# Altium PCB UAVCAN LIDAR.PcbDoc (part 1 of 2)
Units mm, origin at the board's own origin, x right, y up, seen from the top; angles counter-clockwise.
Board outline 36.2 x 66.55 mm, 2 copper layers (Top Layer, Bottom Layer); 103 components, 64 nets, 316 pads, 230 vias.
Unrouted connection lines stored in the file: 2.
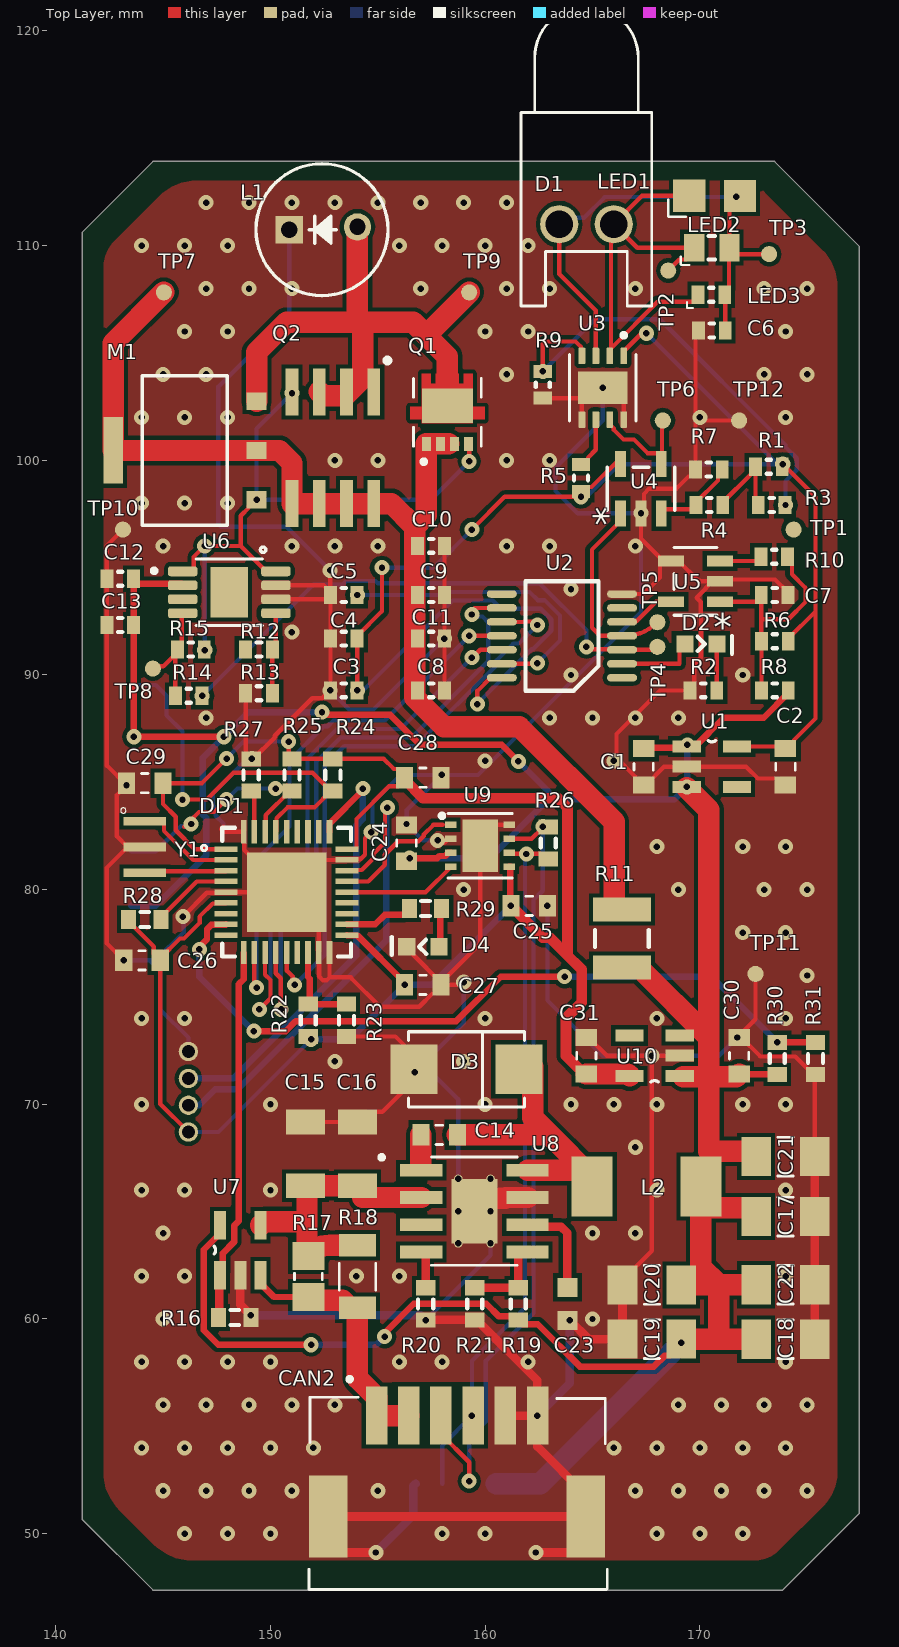
[diagram p0: Top Layer view]
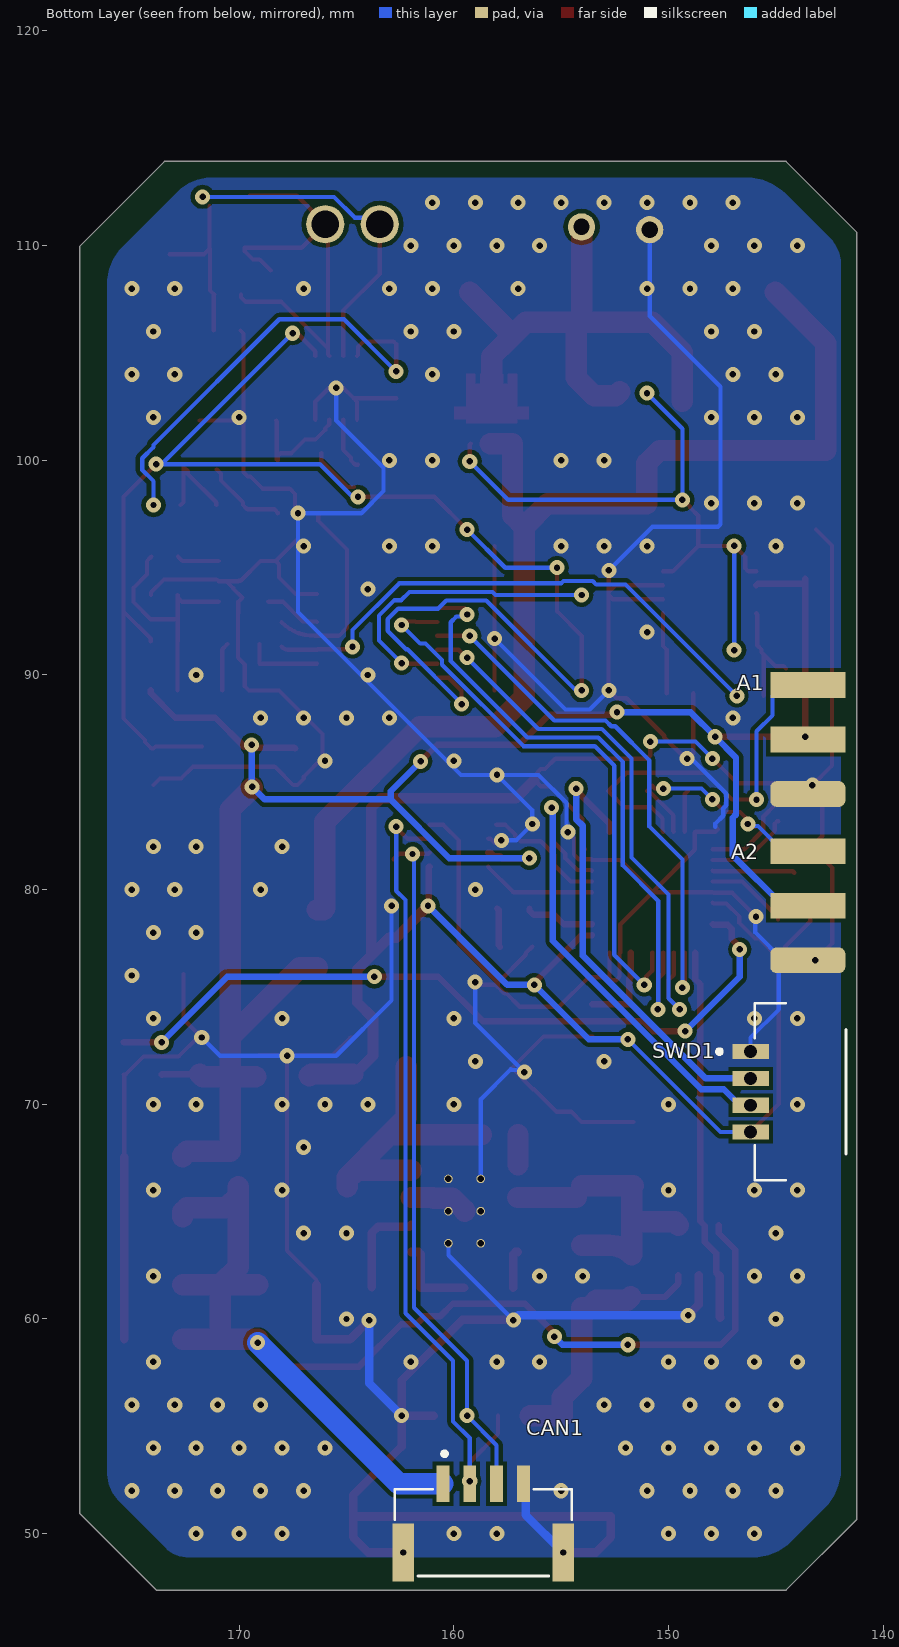
[diagram p1: Bottom Layer view, seen from below]
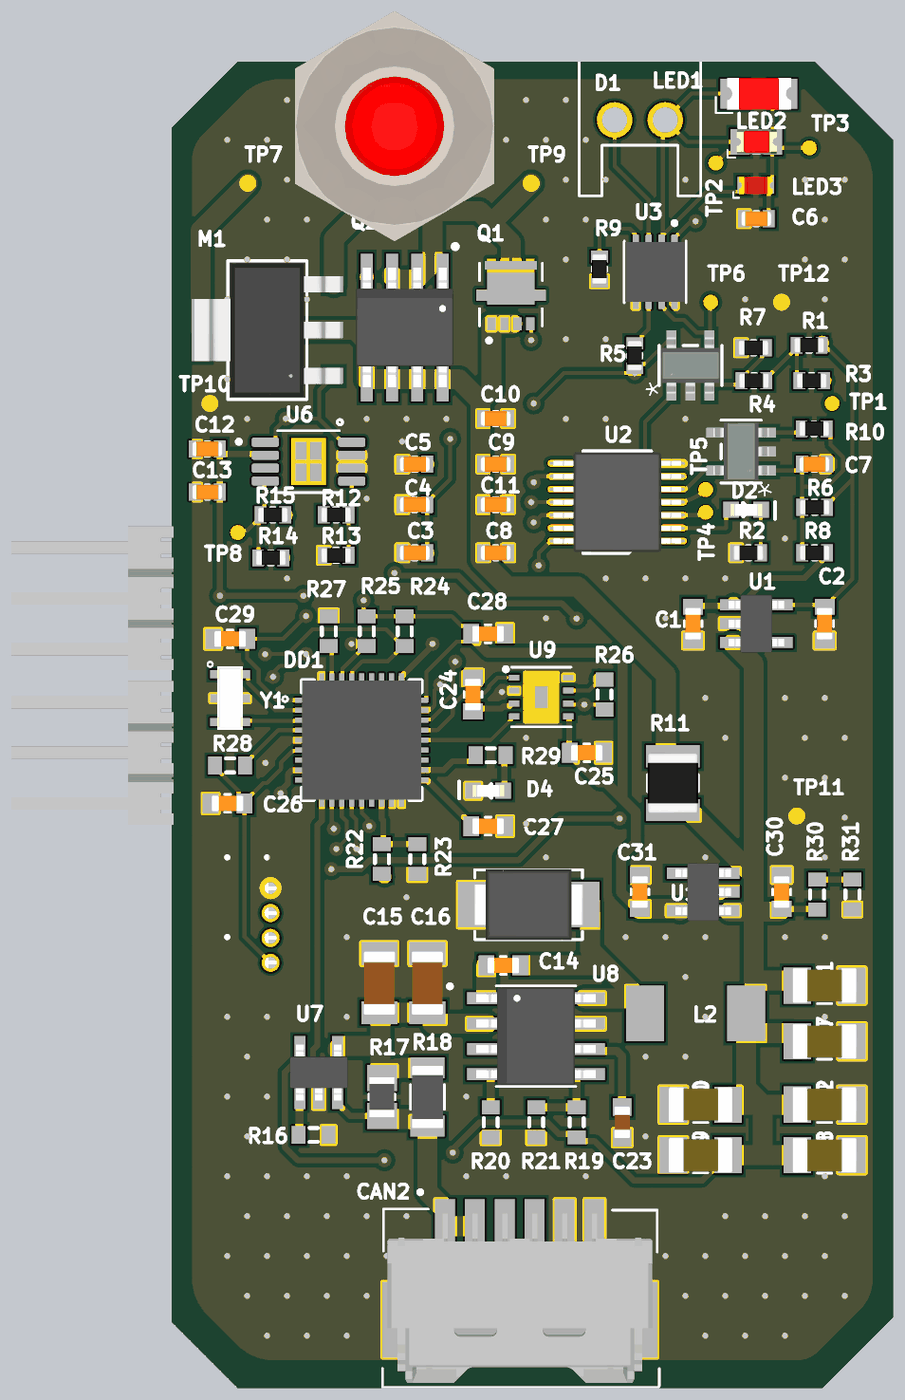
[diagram p2: 3D render of the assembled board from above, using the file's embedded part models]
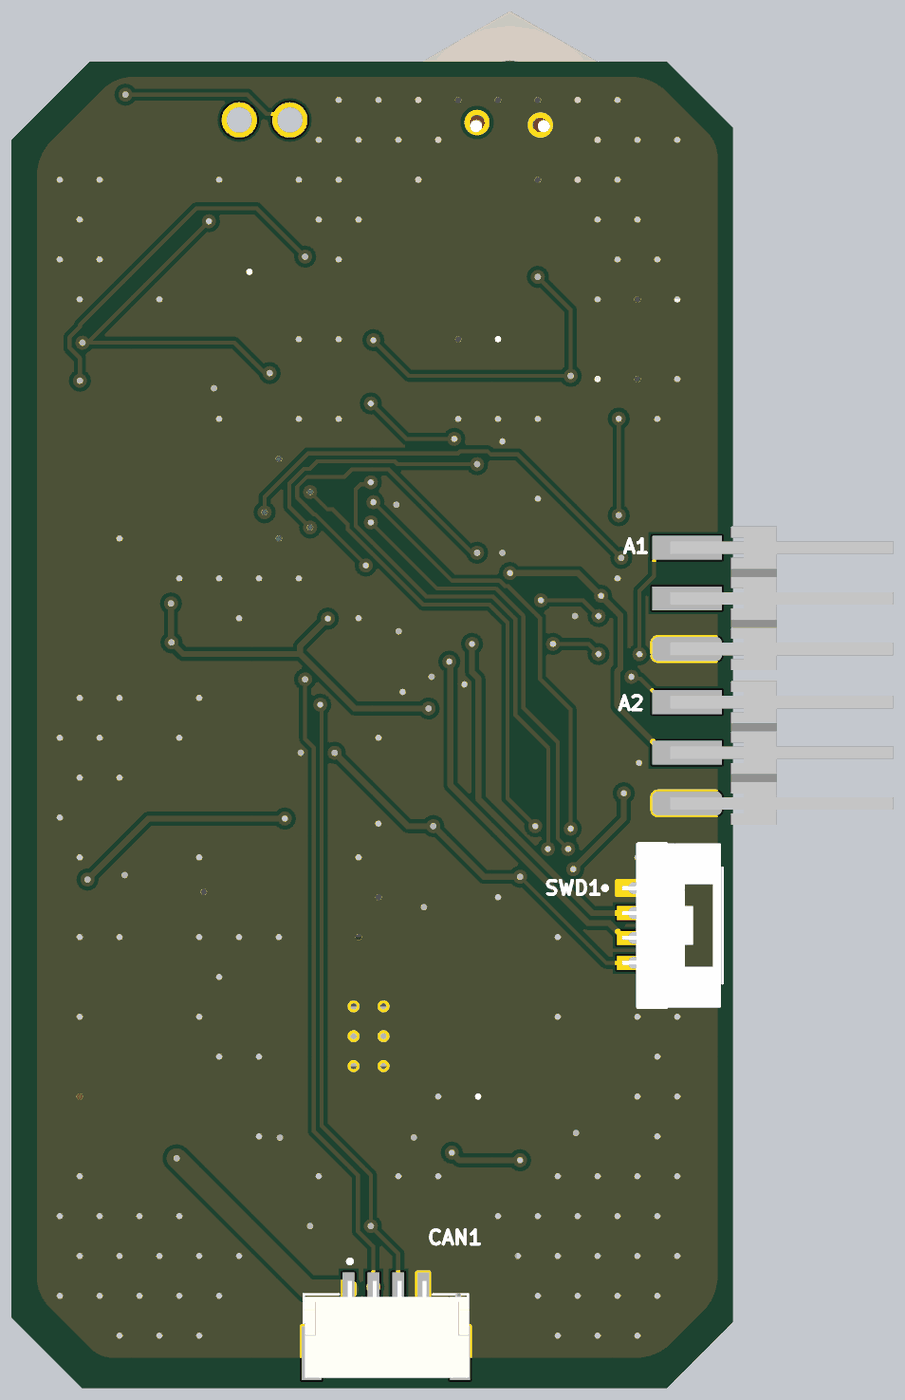
[diagram p3: 3D render of the assembled board from below, using the file's embedded part models]

## Layer stack, top to bottom
Top Solder: solder mask 0.0102, Solder Resist, Dk 3.5
Top Layer: signal copper 0.0356
Dielectric 1: dielectric 0.32, FR-4, Dk 4.8
Bottom Layer: signal copper 0.0356
Bottom Solder: solder mask 0.0102, Solder Resist, Dk 3.5

## Board outline
141.224,50.673 141.224,110.617 144.526,113.919 173.482,113.919 177.419,109.982 177.419,50.927 173.863,47.371 144.526,47.371

## Design rules (kind name [scope] priority, off if disabled: settings)
Clearance [All] p1: gap=0.2 ignorepadtopadclearanceinfootprint=FALSE
HoleSize [All] p1: absolutevalues=TRUE maxlimit=2.54 minlimit=0.3 maxpercent=80.000 minpercent=20.000
PolygonConnect [All] p1: connectstyle=Direct reliefconductorwidth=0.254 reliefentries=4 polygonreliefangle="90 Angle" airgapwidth=0.254
RoutingVias [All] p1: holewidth=0.3 width=0.7 viastyle="Through Hole" minholewidth=0.3 minwidth=0.7 maxholewidth=2 maxwidth=10
SolderMaskExpansion [All] p1: expansion=0.102 istentingtop=FALSE
Width [All] p1: maxlimit=2 minlimit=0.17 preferedwidth=0.254
29 further rules are at their usual default settings.

## Classes and differential pairs
component class CONNECTORS: A1 A2 CAN1 CAN2
component class STM32F103T8: C24 C25 C26 C27 C28 C29 C30 C31 D4 DD1 R22 R23 R24 R25 R26 R27 R28 R29 R30 R31 SWD1 U9 U10 Y1
component class DCDC-LMR16030: C14 C15 C16 C17 C18 C19 C20 C21 C22 C23 D3 L2 R16 R17 R18 R19 R20 R21 U7 U8
component class "UAVCAN LIDAR": C1 C2 C3 C4 C5 C6 C7 C8 C9 C10 C11 C12 C13 D1 D2 L1 LED1 LED2 LED3 M1 Q1 Q2 R1 R2 R3 R4 R5 R6 R7 R8 R9 R10 R11 R12 R13 R14 R15 TP1 TP2 TP3 TP4 TP5 TP6 TP7 TP8 TP9 TP10 TP11 TP12 U1 U2 U3 U4 U5 U6

## Components (designator, comment, footprint, x,y, rotation, side; value= is the part's Value field where it differs from the comment)
A1 "A" "HDR Side 3 pin" 143.51,86.995 r90 bottom
A2 "A" "HDR Side 3 pin" 143.51,79.248 r90 bottom
C1 "GX035C104MAT2-500" *CAPC1608X90 167.386,85.725 r270 top value=0.1u
C2 "GX035C104MAT2-500" *CAPC1608X90 173.99,85.725 r270 top value=0.1u
C3 "" SMD_CAP_0603 153.416,89.281 r180 top value=100nF
C4 "" SMD_CAP_0603 153.416,91.694 r180 top value=2.2uF
C5 "" SMD_CAP_0603 153.416,93.726 r0 top value=1uF
C6 "" SMD_CAP_0603 170.561,106.045 r180 top value=1n
C7 "" SMD_CAP_0603 173.482,93.726 r0 top value=2.2uF
C8 "" SMD_CAP_0603 157.48,89.281 r0 top value=22nF
C9 "" SMD_CAP_0603 157.48,93.726 r0 top value=22nF
C10 "" SMD_CAP_0603 157.48,96.012 r0 top value=22nF
C11 "" SMD_CAP_0603 157.48,91.694 r0 top value=22nF
C12 "" SMD_CAP_0603 143.002,94.488 r180 top value=100nF
C13 "" SMD_CAP_0603 143.002,92.329 r180 top value=10uF
C14 "GX035C104MAT2-500" *CAPC1608X90 157.861,68.58 r180 top value=0.1u
C15 "GRM31CR71H225KA88L" *CAP3216X125N 151.638,67.691 r90 top value=2.2u
C16 "GRM31CR71H225KA88L" *CAP3216X125N 154.051,67.691 r90 top value=2.2u
C17 "GRM31CR61A476KE15L" *CAPC3216X125N 173.99,64.77 r180 top value=47u
C18 "GRM31CR61A476KE15L" *CAPC3216X125N 173.99,61.595 r180 top value=47u
C19 "GRM31CR61A476KE15L" *CAPC3216X125N 167.765,59.059 r0 top value=47u
C20 "GRM31CR61A476KE15L" *CAPC3216X125N 167.765,61.59 r0 top value=47u
C21 "GRM31CR61A476KE15L" *CAPC3216X125N 173.99,67.564 r180 top value=47u
C22 "GRM31CR61A476KE15L" *CAPC3216X125N 173.99,59.055 r180 top value=47u
C23 "GRM188R71C105KA12D" CAPC1608X90N 163.83,60.706 r90 top value=1u
C24 "GX035C104MAT2-500" *CAPC1608X90 156.337,82.169 r90 top value=0.1u
C25 "GX035C104MAT2-500" *CAPC1608X90 162.052,79.248 r0 top value=0.1u
C26 "GX035C104MAT2-500" *CAPC1608X90 144.018,76.708 r180 top value=0.1u
C27 "GX035C104MAT2-500" *CAPC1608X90 157.099,75.565 r0 top value=0.1u
C28 "GX035C104MAT2-500" *CAPC1608X90 157.099,85.217 r0 top value=0.1u
C29 "GX035C104MAT2-500" *CAPC1608X90 144.145,84.963 r180 top value=0.1u
C30 "GX035C104MAT2-500" *CAPC1608X90 171.831,72.263 r90 top value=0.1u
C31 "GX035C104MAT2-500" *CAPC1608X90 164.719,72.263 r90 top value=0.1u
CAN1 "SM04B-GHS-TB(LF)(SN)-" JST_SM04B-GHS-TB(LF)(SN)- 158.633,50.049 r180 bottom
CAN2 "502585-0670" MOLEX_502585-0670 158.69,55.299 r0 top
D1 "LED0" LED-0 164.719,110.998 r180 top
D2 "KP-608SECK" *LEDM1608X80_LTE-C1906R-14(Primary) 170.053,91.44 r180 top
D3 "SK56" *SMB_P6SMB62AT3G(Primary) 159.131,71.628 r0 top
D4 "0603-LED-BLUE" *LEDM1608X80_LTE-C1906R-14(Primary) 157.099,77.343 r0 top
DD1 "STM32F103T8" *QFN50P600X600X100-37N 150.749,79.883 r0 top
L1 "LASER" SPL-PL90 151.13,110.744 r0 top
L2 "IHLP2020BZER100M01" IHLP 167.513,66.167 r180 top
LED1 "LED" LED1206 170.053,112.395 r180 top
LED2 "LED" LED0805 170.561,109.855 r180 top
LED3 "LED" LED0603 170.561,107.696 r180 top
M1 "BSP318SL6327" PG-SOT223-4_INF-L 146.012,100.457 r90 top
Q1 "NTTFS5826NL" *TRANS_NVTFS015N04CTAG 158.242,102.235 r90 top
Q2 "IRF7862" *SO-08 152.908,100.584 r180 top
R1 "0R" "RES 0603 (1608X06L)" 173.837,99.695 r180 top
R2 "1K" "RES 0603 (1608X06L)" 169.545,89.281 r0 top
R3 "0R" "RES 0603 (1608X06L)" 173.964,97.917 r180 top
R4 "?" "RES 0603 (1608X06L)" 171.069,97.917 r180 top
R5 "51R" "RES 0603 (1608X06L)" 164.465,98.552 r90 top
R6 "0R" "RES 0603 (1608X06L)" 174.117,91.567 r180 top
R7 "?" "RES 0603 (1608X06L)" 171.043,99.568 r180 top
R8 "0R" "RES 0603 (1608X06L)" 174.117,89.281 r180 top
R9 "100K" "RES 0603 (1608X06L)" 162.687,102.896 r90 top
R10 "6.25K" "RES 0603 (1608X06L)" 174.091,95.504 r180 top
R11 "100R" "RES 1210 (3226X07L)" 166.37,77.724 r270 top
R12 "100R" "RES 0603 (1608X06L)" 148.844,91.186 r0 top
R13 "100R" "RES 0603 (1608X06L)" 150.088,89.154 r180 top
R14 "0R" "RES 0603 (1608X06L)" 145.568,89.027 r0 top
R15 "0R" "RES 0603 (1608X06L)" 145.669,91.186 r0 top
R16 "Res3" J1-0603 148.336,60.071 r180 top value=1k
R17 "RC0805FR-131RL" RESC2012X60 151.765,61.976 r90 top
R18 "CRGH1206J1R0" RESC3115X65N 154.051,61.976 r90 top
R19 "Res3" J1-0603 161.544,60.706 r270 top value=56k
R20 "Res3" J1-0603 157.226,60.706 r90 top value=56k
R21 "RC0603FR-0710KL" J1-0603 159.512,60.706 r90 top value=10k
R22 "RC0603FR-0710KL" J1-0603 151.765,73.914 r270 top value=10k
R23 "RC0603FR-0710KL" J1-0603 153.543,73.914 r90 top value=10k
R24 "Res3" J1-0603 152.908,85.344 r90 top value=4.7k
R25 "Res3" J1-0603 151.003,85.344 r90 top value=4.7k
R26 "Res3" J1-0603 162.941,82.169 r90 top value=120
R27 "RC0603FR-0710KL" J1-0603 149.098,85.344 r270 top value=10k
R28 "RC0603FR-0710KL" J1-0603 144.145,78.613 r0 top value=10k
R29 "Res3" J1-0603 157.226,79.121 r0 top value=330
R30 "RC0603FR-0710KL" J1-0603 173.609,72.136 r270 top value=10k
R31 "RC0603FR-0710KL" J1-0603 175.387,72.136 r90 top value=10k
SWD1 "BM04B-GHS-TBT(LF)(SN)(N)" JST_BM04B-GHS-holes 142.827,70.582 r90 bottom
TP1 "Test Point" PAD1 174.371,96.774 r0 top
TP2 "Test Point" PAD1 168.529,108.839 r0 top
TP3 "Test Point" PAD1 173.228,109.601 r0 top
TP4 "Test Point" PAD1 168.021,91.313 r0 top
TP5 "Test Point" PAD1 168.021,92.456 r0 top
TP6 "Test Point" PAD1 168.275,101.854 r0 top
TP7 "Test Point" PAD1 145.034,107.823 r0 top
TP8 "Test Point" PAD1 144.526,90.297 r0 top
TP9 "Test Point" PAD1 159.258,107.823 r0 top
TP10 "Test Point" PAD1 143.129,96.774 r90 top
TP11 "Test Point" PAD1 172.593,76.073 r90 top
TP12 "Test Point" PAD1 171.831,101.854 r90 top
U1 "SPX3819M5-L-3-3/TR" *SOT95P280X145-5N 170.561,85.725 r0 top value=3V3
U2 "TDC7200PWR" PW0014A_L 163.576,91.821 r180 top
U3 "MAX3658AETAT" SON65P300X300X80-9N 165.481,103.378 r270 top
U4 "LMV7219M7X/NOPB" SOT-5_S_LIT 167.259,98.679 r90 top
U5 "LTC1799CS5#TRMPBF" SOT-5_S_LIT 169.799,94.361 r180 top
U6 "MIC44F18YMME-TR" SOP65P490X104-9N 148.082,93.853 r0 top
U7 "INA169NA/3K" *SOT95P280X145-5N 148.597,63.206 r90 top
U8 "LMR16030SDDAR" "*SOIC127P600X170-9N - duplicate" 159.5,65.024 r0 top
U9 "TJA1042" SOT782-1 159.766,82.042 r270 top
U10 "SPX3819M5-L-3-3/TR" *SOT95P280X145-5N 167.894,72.263 r180 top value=3V3
Y1 "CSTCE8M00G55-R0" *OSC_CSTCE8M00G55-R0 144.145,81.985 r270 top

## Footprints (in the part's own frame and the unit in brackets; to place one, negate y for a bottom-side part, rotate by r counter-clockwise, add the part's x,y. Pads: shape width x height; smd on the part's side, far side on the other; paste and mask are expansions set on the pad)
*CAP3216X125N [mm]
  rect 1.15x1.82 smd: 1(-1.485,0) 2(1.485,0)
  body extent -1.6,-0.8 1.6,0.8, height 1.22
*CAPC1608X90 [mm]
  rect 0.8x1 smd: 1(-0.85,0) 2(0.85,0)
  silkscreen extent -0.15,-0.45 0.15,0.45, body extent -0.8,-0.4 0.8,0.41, height 0.88
*CAPC3216X125N [mm]
  rect 1.38x1.82 smd: 1(-1.369,0) 2(1.369,0)
  silkscreen extent -0.36,-0.9 0.36,0.9, body extent -1.6,-0.87 1.6,0.87, height 1.71
*LEDM1608X80_LTE-C1906R-14(Primary) [mm]
  rect 0.8x0.8 smd: A(0.75,0) C(-0.75,0)
  silkscreen extent -1.45,-0.38 0.16,0.45, body extent -0.8,-0.3 0.8,0.3, height 1.15
*OSC_CSTCE8M00G55-R0 [mm]
  rect 0.4x2 smd: 1(-1.2,0) 2(0,0) 3(1.2,0)
  silkscreen extent -1.83,-1.13 -1.57,-0.87, body extent -1.6,-0.65 1.6,0.65, height 1
*QFN50P600X600X100-37N [mm]
  rect 1.08x0.26 smd: 1(-2.815,2) 2(-2.815,1.5) 3(-2.815,1) 4(-2.815,0.5) 5(-2.815,0) 6(-2.815,-0.5) 7(-2.815,-1) 8(-2.815,-1.5) 9(-2.815,-2) 19(2.815,-2) 20(2.815,-1.5) 21(2.815,-1) 22(2.815,-0.5) 23(2.815,0) 24(2.815,0.5) 25(2.815,1) 26(2.815,1.5) 27(2.815,2)
  rect 0.26x1.08 smd: 10(-2,-2.815) 11(-1.5,-2.815) 12(-1,-2.815) 13(-0.5,-2.815) 14(0,-2.815) 15(0.5,-2.815) 16(1,-2.815) 17(1.5,-2.815) 18(2,-2.815) 28(2,2.815) 29(1.5,2.815) 30(1,2.815) 31(0.5,2.815) 32(0,2.815) 33(-0.5,2.815) 34(-1,2.815) 35(-1.5,2.815) 36(-2,2.815)
  rect 3.7x3.7 smd: 37(0,0)
  silkscreen extent -3.97,-3 3,3, body extent -3,-3 3,3, height 1
*SMB_P6SMB62AT3G(Primary) [mm]
  rect 2.2x2.3 smd: A(-2.45,0) C(2.45,0)
  silkscreen extent -2.7,-1.75 2.7,1.75, body extent -2.72,-1.78 2.72,1.78, height 2.49
*SO-08 [mm]
  rect 0.6x2.2 smd: D(-1.905,2.6) D(-0.635,2.6) D(0.635,2.6) D(1.905,2.6) G(1.905,-2.6) S(-1.905,-2.6) S(-0.635,-2.6) S(0.635,-2.6)
  silkscreen extent -2.64,-4.16 -2.44,-3.96, body extent -2.45,-3 2.45,3, height 1.73
"*SOIC127P600X170-9N - duplicate" [mm]
  rect 1.97x0.6 smd: 1(-2.475,1.905) 2(-2.475,0.635) 3(-2.475,-0.635) 4(-2.475,-1.905) 5(2.475,-1.905) 6(2.475,-0.635) 7(2.475,0.635) 8(2.475,1.905)
  round 0.4 hole 0.3: 9(-0.75,-1.5) 9(-0.75,0) 9(-0.75,1.5) 9(0.75,-1.5) 9(0.75,0) 9(0.75,1.5)
  rect 2.13x3 smd: 9(0,0)
  silkscreen extent -4.42,-2.52 2,2.6, body extent -3,-2.45 3,2.45, height 1.69
*SOT95P280X145-5N [mil]
  rect 52x22 smd: 1(-46,37) 2(-46,0) 3(-46,-37) 4(46,-37) 5(46,37)
  silkscreen extent -7,46 7,48, body extent -55,-57 55,57, height 57
*TRANS_NVTFS015N04CTAG [mm]
  rect 1.6x2.37 smd: D(0.3,0)
  rect 0.66x0.42 smd: G(-1.47,-0.975) S(-1.47,-0.325) S(-1.47,0.325) S(-1.47,0.975)
  Top Layer region: -0.5,-1.185 -0.5,1.185 -0.32,1.185 -0.32,1.73 0.25,1.73 0.25,1.185 1.8,1.185 1.8,0.765 1.33,0.765 1.33,0.535 1.8,0.535 1.8,0.115 1.33,0.115 1.33,-0.115 1.8,-0.115 1.8,-0.535 1.33,-0.535 1.33,-0.765 1.8,-0.765 1.8,-1.185 0.25,-1.185 0.25,-1.73 -0.32,-1.73 -0.32,-1.185
  silkscreen extent -2.4,-1.58 1.58,1.58
CAPC1608X90N [mm]
  rect 0.89x0.93 smd: 1(-0.77,0) 2(0.77,0)
  body extent -0.8,-0.4 0.8,0.4, height 0.9
"HDR Side 3 pin" [mm]
  rrect50% 1.2x3.5 smd: 1(-2.54,0)
  rect 1.2x3.5 smd: 2(0,0) 3(2.54,0)
  body extent -3.61,-10.34 3.61,0.83, height 1.67
IHLP [mil]
  rect 75x110 smd: 1(-100,0) 2(100,0)
  body extent -100,-100 100,100, height 79
J1-0603 [mm] "Chip Resistor, Body 1.6x0.8mm, IPC High Density"
  rect 0.7x0.9 smd: 1(-0.75,0) 2(0.75,0)
  silkscreen extent -0.2,-0.35 0.2,0.35, body extent -0.85,-0.48 0.85,0.48, height 0.9
JST_BM04B-GHS-holes [mm]
  rect 0.7x1.7 / inner rect 0.6x1.7 / far side round 0.9 hole 0.6: 1(1.875,3.35) 2(0.625,3.35) 3(-0.625,3.35) 4(-1.875,3.35)
  silkscreen extent -4.13,-1.1 4.13,4.9, body extent -4.12,-1.02 4.12,3.93, height 4.15
JST_SM04B-GHS-TB(LF)(SN)- [mm]
  rect 0.6x1.7 smd: 1(-1.875,2.275) 2(-0.625,2.275) 3(0.625,2.275) 4(1.875,2.275)
  rect 1x2.7 smd: SH1(-3.725,-0.925) SH2(3.725,-0.925)
  silkscreen extent -4.13,-2.02 4.13,3.77, body extent -4.06,-2.16 4.19,2.69, height 4.35
LED0603 [mm]
  rect 0.6x0.85 smd: 1(-0.6,-0.021) 2(0.644,-0.021)
  silkscreen extent -0.08,-0.35 1.15,0.6, body extent -0.82,-0.48 0.88,0.42, height 0.9
LED0805 [mm]
  rect 0.95x1.3 smd: 1(-0.822,-0.047) 2(0.828,-0.047)
  silkscreen extent -0.15,-0.6 1.45,0.75, body extent -1.03,-0.67 0.99,0.58, height 1.1
LED1206 [mm]
  rect 1.5x1.5 smd: 1(-1.814,0.08) 2(0.55,0.075)
  silkscreen extent 0.7,0.25 1.53,1.05, body extent -2.25,-0.73 0.95,0.87, height 1.1
LED-0 [mil] "LED; 2 Leads"
  round 70 hole 50: 1(50,0) 2(-50,0)
  silkscreen extent -120,-400 120,150
MOLEX_502585-0670 [mm]
  rect 1x2.7 smd: 1(-3.75,0.2) 2(-2.25,0.2) 3(-0.75,0.2) 4(0.75,0.2) 5(2.25,0.2) 6(3.75,0.2)
  rect 1.8x3.8 smd: P1(-6,-4.5) P2(6,-4.5)
  silkscreen extent -6.9,-7.9 7,2, body extent -6.65,-7.68 6.65,0.82, height 6.41
PAD1 [mm]
  round 0.75 smd paste-1 mask+0.051: 1(0,0)
PG-SOT223-4_INF-L [mil]
  rect 32x36 smd paste+0 mask+0: 1(-90.55,-131.5) 2(0,-131.5) 3(90.55,-131.5)
  rect 122x36 smd paste+0 mask+0: 4(0,131.5)
  silkscreen extent -187,-148 137,78, body extent -132,-143 132,144, height 67
PW0014A_L [mm]
  oval 1.4x0.35 smd paste-0.102 mask+0.051: 1(-2.8,1.95) 2(-2.8,1.3) 3(-2.8,0.65) 4(-2.8,0) 5(-2.8,-0.65) 6(-2.8,-1.3) 7(-2.8,-1.95) 8(2.8,-1.95) 9(2.8,-1.3) 10(2.8,-0.65) 11(2.8,0) 12(2.8,0.65) 13(2.8,1.3) 14(2.8,1.95)
  silkscreen extent -1.7,-2.55 1.7,2.55, body extent -3.2,-2.5 3.2,2.5, height 1.13
"RES 0603 (1608X06L)" [mm] "Chip Resistor, 2-Leads, Body 1.6x0.8mm, IPC High Density _ (0.063W)"
  rect 0.6x0.85 smd: 1(0,0) 2(1.244,0)
  silkscreen extent 0.52,-0.33 0.72,0.33, body extent -0.14,-0.38 1.38,0.38, height 0.45
"RES 1210 (3226X07L)" [mm] "Chip Resistor, 2-Leads, Body 3.2x2.6mm, IPC High Density _ (0.250 W)"
  rect 1.1x2.7 smd: 1(-1.35,0) 2(1.35,0)
  silkscreen extent -0.4,-1.25 0.4,1.25, body extent -1.52,-1.27 1.52,1.27, height 0.6
RESC2012X60 [mm]
  rect 1.3x1.5 smd: 1(-0.95,0) 2(0.95,0)
  silkscreen extent -0.15,-0.65 0.15,0.65, body extent -1,-0.63 1,0.63, height 0.3
RESC3115X65N [mm]
  rect 1.05x1.72 smd: 1(-1.46,0) 2(1.46,0)
  silkscreen extent -0.62,-0.85 0.62,0.85, body extent -1.55,-0.77 1.55,0.77, height 0.65
SMD_CAP_0603 [mm]
  rect 0.6x0.85 smd: 1(-0.622,0) 2(0.622,0)
  silkscreen extent -0.1,-0.33 0.1,0.33, body extent -0.76,-0.38 0.76,0.38, height 0.6
SON65P300X300X80-9N [mm]
  rrect25% 0.76x0.32 smd: 1(-1.485,0.975) 2(-1.485,0.325) 3(-1.485,-0.325) 4(-1.485,-0.975) 5(1.485,-0.975) 6(1.485,-0.325) 7(1.485,0.325) 8(1.485,0.975)
  rect 1.5x2.3 smd paste-2: 9(0,0)
  silkscreen extent -2.54,-1.55 1.55,1.55, body extent -1.5,-1.5 1.5,1.5, height 0.75
SOP65P490X104-9N [mm]
  rrect50% 1.37x0.46 smd: 1(-2.17,0.975) 2(-2.17,0.325) 3(-2.17,-0.325) 4(-2.17,-0.975) 5(2.17,-0.975) 6(2.17,-0.325) 7(2.17,0.325) 8(2.17,0.975)
  rect 1.73x2.36 smd paste-2: 9(0,0)
  silkscreen extent -3.6,-1.55 1.55,1.55
SOT782-1 [mm]
  rect 0.3x0.525 smd: 1(-0.975,-1.362) 2(-0.325,-1.362) 3(0.325,-1.362) 4(0.975,-1.362) 5(0.975,1.362) 6(0.325,1.362) 7(-0.325,1.362) 8(-0.975,1.362)
  rect 2.45x1.65 smd paste-2: P$9(0,0)
  silkscreen extent -1.5,-1.88 1.5,1.5, body extent -1.52,-1.52 1.52,1.52, height 0.85
SOT-5_S_LIT [mm]
  rect 1.211x0.501 smd paste+0 mask+0: 1(-1.15,0.95) 2(-1.15,0) 3(-1.15,-0.95) 4(1.15,-0.95) 5(1.15,0.95)
  silkscreen extent -1,-1.58 1,1.58, body extent -1.4,-1.45 1.4,1.45, height 1.7
SPL-PL90 [mil]
  rect 50x50 / inner round 50 / far side round 50 hole 30 mask+0: 1(-10,0)
  round 50 hole 30 mask+0: 2(115,5)
  silkscreen extent -71,-121 171,121, body extent -147,-230 247,225, height 833

## Part data
A1 A2: library part "Header 3", "Header, 4-Pin", ChipDip_Link=https://www.chipdip.ru/product/pls-3, HelpURL=https://static.chipdip.ru/lib/227/DOC000227157.pdf, MF="Connfly electronic (Zhenqin)", MP="PLS-3 (DS1021-1x3)", System=Connector, Type=SMD
C1 C2 C14 C24 C25 C26 C27 C28 C29 C30 C31: "Cap Thin Film 0.1uf 50v 0603", Package="0603 AVX", MF=AVX, Pacage Metric=1608, SnapEDA_Link=https://www.snapeda.com/parts/GX035C104MAT2-500/AVX/view-part/?ref=snap, Type=SMD
  C1 C2 C30 C31: MP=GX035C104MAT2-500
  C14 C24 C25 C26 C27 C28 C29: MP="GX035C104MAT2-500 or CL10B104JB8NNNC"
C3 C4 C5 C6 C7 C8 C9 C10 C11 C12 C13: library part Cap-Bipolar, "Bipolar Capacitor", Voltage=100V, Adding Date=1387/12/20, Designer="Saeid Jorablo", Organazation=ControTec
C15 C16: "1206 2.2 uF 50 V Â±10% Tolerance X7R SMT Multilayer Ceramic Capacitor", Package="1206 Murata", MF="Murata Electronics", MP=GRM31CR71H225KA88L, SnapEDA_Link=https://www.snapeda.com/parts/GRM31CR71H225KA88L/Murata%20Electronics%20North%20America/view-part/?ref=snap, Type=SMD
C17 C18 C19 C20 C21 C22: "Multilayer Ceramic Capacitor, GRM Series, 47 - F, - 10%, X5R, 10 V, 1206 [3216 Metric]", Package="1206 Murata Electronics", MF="Murata Electronics", MP=GRM31CR61A476KE15L, SnapEDA_Link=https://www.snapeda.com/parts/GRM31CR61A476KE15L/Murata%20Electronics%20North%20America/view-part/?ref=snap, Type=SMD
C23: "SMD Capacitor X7R(EIA) with Capacitance: 1.0uF Tol. 10%. Rated Voltage: 16Vdc", Package=0603, ChipDip_Link=https://www.chipdip.ru/product/grm188r71c105ka12d, HelpURL=https://static.chipdip.ru/lib/428/DOC005428493.pdf, MF="Murata Electronics", MP=GRM188R71C105KA12D, Pacage Metric=1608, SnapEDA_Link=https://www.snapeda.com/parts/GRM188R71C105KA12D/Murata%20Electronics%20North%20America/view-part/228340/?ref=snap, Type=SMD
CAN1: "Connector Header Surface Mount, Right Angle 4 position 0.049 _1.25mm_", Package=None, Availability=Unavailable, ChipDip_Link=https://www.chipdip.ru/product/sm04b-ghs-tb-lf-sn-gh-1.25mm-header-side-ent, HelpURL=http://www.farnell.com/datasheets/2082975.pdf, MF="JST Sales", MP=SM04B-GHS-TB_LF__SN_-, Price=None, SnapEDA_Link=https://www.snapeda.com/parts/SM04B-GHS-TB%28LF%29%28SN%29-/JST%20Sales%20America%20Inc./view-part/2759740/?ref=snap, System=Connector
CAN2: "1.50mm Pitch, CLIK-Mate PCB Receptacle, Single Row, Surface Mount, Right-Angle, Tin Plating, Positive Lock, 6 Circuits, Natural", Package=None, Availability=Unavailable, MF=Molex, MP=502494-0670, Price=None, SnapEDA_Link=https://www.snapeda.com/parts/502494-0670/Molex/view-part/?ref=snap, System=Connector
D1: "Typical INFRARED GaAs LED", LatestRevisionDate=08-Jul-2005, LatestRevisionNote="Mech Layer 1 removed.", PackageDescription="LED; 2 Leads", PackageReference=LED-0, Published=8-Jun-2000, Publisher="Altium Limited"
D2: library part 0603-LED-ORANGE, "Orange 605nm LED Indication - Discrete 2.2V 0603 (1608 Metric)", Package="0603 Lite-On", MP="SML-D12D1WT86 or LTST-C194KFKT", SnapEDA_Link=https://www.snapeda.com/parts/SML-D12D1WT86/Rohm/view-part/?ref=search&t=0603%20LED%20orange, Type=SMD
D3: "Äèîä Øîòòêè 5À 60Â [SMB / DO-214AA]", Package="DO-214 Littelfuse", ChipDip_Link=https://www.chipdip.ru/product/sk56, MF="Littelfuse Inc.", MP=SK56, SnapEDA_Link=https://www.snapeda.com/parts/P6SMB62AT3G/Littelfuse%20Inc./view-part/?ref=snap, Type=SMD
D4: library part LTE-C1906R-14, "LED IrLED Chip LED 2-Pin SMD T/R", Package="0603 Lite-On", MP=0603-LED-BLUE, SnapEDA_Link=https://www.snapeda.com/parts/LTE-C1906R-14/Lite-On%20Inc./view-part/?ref=snap, Type=SMD
DD1: "STM32F103T8U6, Ìèêðîêîíòðîëëåð 32BIT ARM 64K FLASH [VFQFPN-36]", Package=VFQFPN-36, ChipDip_Link=https://www.chipdip.ru/product/stm32f103t8u6-2, HelpURL=http://www.st.com/stonline/products/literature/ds/13587.pdf, MF=STM, MP=STM32F103T8U6, SnapEDA_Link=https://www.snapeda.com/parts/STM32F103T8U6TR/STMicroelectronics/view-part/?ref=search&t=STM32F103T8U6, Type=SMD
L1: library part SPL-PL90, "5mm Laser beam transmitter", ChipDip_Link=https://www.chipdip.ru/product0/8001775090, Designer=EhsanShaghaei
L2: "10AµH Shielded Molded Inductor 2.3A 199mOhm Max Nonstandard", Package="Nonstandard Vishay", ChipDip_Link=https://www.chipdip.ru/product/ihlp2020bzer100m11-inductor-ihlp-smd-2020-10, HelpURL=http://www.vishay.com/docs/34253/ihlp-2020bz-01.pdf, MF="Vishay Dale", MP=IHLP2020BZER100M01, SnapEDA_Link=https://www.snapeda.com/parts/IHLP2020BZER100M01/Vishay%20Dale/view-part/44808/?ref=snap, Type=SMD
M1 U6: "No Description Available", Copyright="Copyright (C) 2018 Accelerated Designs. All rights reserved", RefDes=RefDes, Type=DEV
  M1: Built_By=EMA_Cory, ChipDip_Link=https://www.chipdip.ru/product0/8001781161, Datasheet=https://www.mouser.com/datasheet/2/196/Infineon-BSP318S-DS-v02_04-en-522823.pdf, Designer=EhsanShaghaei, Manufacturer_Part_Number=BSP318SL6327, SourceLibrary=Add_to_database_2021-03-11, Vendor=Infineon
  U6: Built_By=EMA_Molly, ChipDip_Link=https://www.chipdip.ru/product/mic44f18ymme, Designer="Ehsan Shaghaei", Manufacturer_Part_Number=MIC44F18YMME-TR, SourceLibrary=Microchip_2019-09-03, Vendor=Microchip
Q1: "NTTFS5826NLTAG, MOSFET N-CHANNEL 60V 20A 24MOHM WDFN8", ChipDip_Link=https://www.chipdip.ru/product/nttfs5826nltag-mosfet-n-channel-60v-20a, HelpURL=http://www.farnell.com/datasheets/2028673.pdf, SnapEDA_Link=https://www.snapeda.com/parts/NVTFS5124PLTAG/ON%20Semiconductor/view-part/?ref=search&t=NVTFS5124PLTAG
Q2: "N-Channel MOSFET", LatestRevisionDate=17-Jul-2002, LatestRevisionNote="Re-released for DXP Platform.", PackageDescription="TO, Flat Index; 3 In-Line, Axial Leads; Body Dia. 4.6mm; Lead Dia. 0.5 mm (max)", PackageReference=E3, PackageVersion=1995/1996, Published=8-Jun-2000, Publisher="Altium Limited"
R1 R2 R3 R4 R5 R6 R7 R8 R9 R10 R11 R12 R13 R14 R15: library part Resistor, "Resistor", Power="1/8 W", Tolerance=5%
R16: "Resistor", LatestRevisionDate=29-May-2009, LatestRevisionNote="IPC-7351 Footprint Added.", PackageDescription="Chip Resistor", PackageReference=J1-0603, Published=8-Jun-2000, Publisher="Altium Limited"
R17: "RC Series 0805 0.125 W 2 kOhms 5% Â±100 ppm/Â°C SMT Thick Film Chip Resistor", Package=None, Availability=Unavailable, MF="{'manufacturer': u'Yageo'}", MP=RC0805FR-131RL, Price=None
R18: "Res Thick Film 1206 1 Ohm 5% 1/2W Â±200ppm/Â°C Molded SMD SMD T/R", Package=None, Availability=Unavailable, MF="{'manufacturer': u'TE Connectivity'}", MP=CRGH1206J1R0, Price=None
R19 R20 R24 R25 R29: "Resistor", Package=R0603, Pacage Metric=1608, Type=SMD
  R19 R20: ChipDip_Link=https://www.chipdip.ru/product0/9000079754, HelpURL=https://www.chipdip.ru/product0/9000079754, MP=RC0603FR-0756KL
  R24 R25: ChipDip_Link=https://www.chipdip.ru/product0/9000079736, HelpURL=https://www.chipdip.ru/product0/9000079736, MP="4.7K 1% 0603"
  R29: ChipDip_Link=https://www.chipdip.ru/product0/9000079628, HelpURL=https://www.chipdip.ru/product0/9000079628, MP=RC0603FR-07330RL
R21 R22 R23 R27 R28 R30 R31: "10 kOhms 1 0.1 W 1 10 W Chip Resistor 0603 1608 Metric Thick Film", Package=R0603, ChipDip_Link=https://www.chipdip.ru/product0/9000079736, HelpURL=https://www.chipdip.ru/product0/9000079736, MF="Yageo or NXP", MP="10K 1% 0603", Pacage Metric=1608, SnapEDA_Link=https://www.snapeda.com/parts/RC0603FR-0710KL/Yageo/view-part/?ref=dk&t=RC0603FR-0710KL&con_ref=None, Type=SMD
R26: "120 Ohms 1 0.1 W 1 10 W Chip Resistor 0603 1608 Metric Thick Film", Package=R0603, ChipDip_Link=https://www.chipdip.ru/product0/9000079618, HelpURL=https://www.chipdip.ru/product0/9000079618, MP=RC0603FR-07120RL, Pacage Metric=1608, Type=SMD
SWD1: "Conn Shrouded Header HDR 4 POS 1.25mm Solder ST SMD Reel", Package=None, Instructions="Do not install", MF="JST Sales", MP=SM04B-GHS-TB(LF)(SN), SnapEDA_Link=https://www.snapeda.com/parts/BM04B-GHS-TBT%28LF%29%28SN%29%28N%29/JST%20Sales%20America%20Inc./view-part/?ref=snap, System=Connector, Type=SMD
TP1 TP2 TP3 TP4 TP5 TP6 TP7 TP8 TP9 TP10 TP11 TP12: library part PLUG
U1 U10: library part SPX3819M5-L, "Low Dropout Voltage Regulator, Adjustable 0.5A, Â±1%, 2.5 to 16 Vin, 5-Pin SOT-23", Package="SOT-23-5 Exar", ChipDip_Link=https://www.chipdip.ru/product1/8003455237, HelpURL=http://www.farnell.com/datasheets/2614478.pdf, MF="MaxLinear, Inc.", MP=SPX3819M5-L-3-3/TR, SnapEDA_Link=https://www.snapeda.com/parts/SPX3819M5-L/MaxLinear%2C%20Inc./view-part/?ref=snap, Type=SMD
U3: Package=None, Availability=Unavailable, MF="{'manufacturer': u'Maxim Integrated'}", MP=MAX3658AETAT, Price=None
U4: Manufacturer=NationalSemiconductor, PartNumber=LMV7219M7, Characteristics=LMV7219M77nsec27Vto5VcomparatorwithRail-to-RailOutput, ChipDip_Link=https://www.chipdip.ru/product0/8005529462, ComponentLink1DescBC=LMV7219Datasheet, ComponentLink1Description="New link", ComponentLink1URL=http//wwwnationalcom/ds/LM/LMV7219pdf, ComponentLink2DescA4=LMV7219WebPage, ComponentLink2URL=http//wwwnationalcom/pf/LM/LMV7219html, ComponentLink3DescAC=MAA05APackageWebPage, ComponentLink3URL=http//wwwnationalcom/packaging/folders/maa05ahtml, CompType=ComparatorIC, Copyright="Copyright (C) 2018 Accelerated Designs. All rights reserved", Designer=EhsanShaghaei, LatestRevisionDate=2009-03-16, LatestRevisionNote=MassUpdate, PackageDescription=5LeadSC-70, PackageReference=MAA05A_L, Published=2009-03-16, Publisher=NationalSemiconductor, RoHS=O, SymbolVersion=2008-07-09, TaMax_C=850, TaMin_C=-400, Version=B1608
U5: library part LTC1799CS5, Built_By=EMA_UL_Team, ComponentLink1Description=ChipDip_Link, ComponentLink1URL=https://www.chipdip.ru/product1/8002977151, ComponentLink2Description=Designer, ComponentLink2URL="Ehsan Shaghaei", Copyright="Copyright (C) 2018 Accelerated Designs. All rights reserved", Manufacturer_Part_Number=LTC1799CS5#TRMPBF, RefDes=RefDes, SourceLibrary=LinearTech_2016_03_08, Type=DEV, Vendor="Linear Technology"
U7: "Current Monitor Regulator High-Side SOT-23-5", Package="SOT-23-5 Texas Instruments", Availability=Unavailable, MF="Texas Instruments", MP=INA169NA/3K, Price=None, SnapEDA_Link=https://www.snapeda.com/parts/INA169NA/3K/Texas%20Instruments/view-part/449193/?ref=snap
U8: "LMR16030SDDAR, Conv DC-DC 4.3V to 60V Step Down Single-Out 1V to 50V 3A Automotive 8-Pin HSOP EP T/R", Package="PowerSOIC-8 Texas Instruments", ChipDip_Link=https://www.chipdip.ru/product1/8003448566, HelpURL=https://www.ti.com/lit/ds/symlink/lmr16030.pdf, MF="Texas Instruments", MP=LMR16030SDDAR, SnapEDA_Link=https://www.snapeda.com/parts/TPS54560DDA/Texas%20Instruments/view-part/?ref=snap, Type=SMD
U9: "1/1 Transceiver Half CANbus 8-SO", Package="VDFN-8 NXP USA", ChipDip_Link=https://www.chipdip.ru/product1/8002840332, HelpURL=https://static.chipdip.ru/lib/583/DOC001583059.pdf, MF="NXP USA", MP=TJA1042, SnapEDA_Link=https://www.snapeda.com/parts/TJA1042/NXP%20USA%20Inc./view-part/900919/?ref=snap, Type=SMD
Y1: "Ceramic Resonator 8MHz ??0.5% _Tol_ ??0.2% _Stability_ 33pF 40Ohm 3-Pin CSMD T/R", Package="SMD-3 Murata", ChipDip_Link=https://www.chipdip.ru/product1/8001783721, HelpURL=https://www.murata.com/en-eu/api/pdfdownloadapi?cate=&partno=CSTCE8M00G55-R0, MF=Murata, MP=CSTCE8M00G55-R0, SnapEDA_Link=https://www.snapeda.com/parts/CSTCE8M00G55-R0/Murata%20Electronics%20North%20America/view-part/?ref=snap, Type=SMD
LED1 LED2 LED3: Designer="Razi Research Team Of Mashhad - Hamed Jafarzadeh"
U2: ChipDip_Link=https://www.chipdip.ru/product1/8002200734, Designer="Ehsan Shaghaei"

## Via types
v1: diameter 0.7, hole 0.3, Top Layer to Bottom Layer, tented both sides, 230 vias

## Nets (pads, with @x,y where several pads share a name; then routed paths per layer and width w, separated by ;. In a path a pad name is that pad's centre, name@x,y a point inside that pad or via, vN(x,y) a via of type N, cw(c..) or ccw(c..) an arc to the next point about the centre after c; other vN are vias at no path point)
3.3: C25.1 C26.1 C27.1 C28.1 C29.1 C31.1 DD1.1 DD1.6 DD1.19 DD1.27 R22.2 R24.2 R25.2 R28.1 SWD1.4 U9.5 U10.5 | length 90.5
  Top Layer w0.2: R28.1 143.395,78.513 144.568,77.34 144.568,77.008 C26.1 ; SWD1.4 144.868,70.016 C26.1 ; DD1.6 147.904,79.353 147.31,79.353 146.7,78.743 146.7,78.45 145.976,77.726 145.786,77.726 144.868,76.808 C26.1 ; DD1.1 146.467,81.883 145.585,82.765 145.585,83.396 144.995,83.986 C29.1 146.812,84.963 v1(147.955,86.106) ; v1(150.847,86.897) 150.847,86.25 R25.2 R24.2 155.272,86.094 155.749,85.617 155.949,85.617 156.249,85.317 C28.1 156.249,85.117 155.949,84.817 155.526,84.817 154.004,83.295 154.004,81.913 153.974,81.883 DD1.27@153.886,81.883
  Top Layer w0.3: DD1.19 153.584,77.863 154.051,77.863 156.249,75.665 v1(156.249,75.565) ; U9.5 161.165,81.067 161.165,79.285 v1(161.202,79.248)
  Top Layer w0.5: C28.1@156.249,85.117 157.106,84.26 163.39,84.26 163.841,83.809 163.841,77.101 163.76,77.02 ; v1(161.202,79.248) 162.687,77.763 163.018,77.763 163.76,77.02 ; C31.1 164.619,71.413 163.769,72.263 163.769,74.022 164.503,74.756 164.503,76.277 163.76,77.02
  Top Layer w1: C31.1 166.636,71.413 U10.5
  Bottom Layer w0.2: SWD1.4 147.574,68.707 v1(151.892,73.025) ; v1(147.955,86.106) 148.746,86.897 v1(150.847,86.897)
  Bottom Layer w0.3: v1(151.892,73.025) 153.709,73.025 v1(156.249,75.565) 157.519,75.565 v1(161.202,79.248)
3v3: C2.1 C3.1 C4.1 R1.1 R5.1 R6.1 U1.5 U2.14 U3.1 U4.5 | length 76.8
  Top Layer w0.2: C3.1 C4.1 154.038,91.819 155.194,92.975 v1(155.194,94.996) ; v1(159.385,96.774) 160.909,98.298 v1(164.465,98.298) ; v1(159.639,88.646) 159.639,89.259 160.251,89.871 U2.14 ; R5.1@164.665,98.752 164.952,98.752 166.182,99.982 U4.5@166.182,100.337 ; U3.1 166.456,105.083 167.291,105.918 v1(167.513,105.918) ; U1.5 173.9,86.665 C2.1 174.09,86.575 174.39,86.875 174.39,86.975 175.387,87.972 175.387,92.962 ; v1(173.863,99.822) 175.387,98.298 175.387,92.962 ; R6.1 174.117,91.692 175.387,92.962
  Bottom Layer w0.2: v1(154.051,89.281) 154.305,89.281 158.492,93.468 160.353,93.468 160.734,93.087 162.594,93.087 163.083,92.598 163.083,92.06 162.224,91.201 162.164,91.201 159.639,88.676 v1(159.639,88.646) ; v1(155.194,94.996) 157.607,94.996 v1(159.385,96.774) ; v1(164.465,98.298) 164.719,98.298 166.243,99.822 v1@173.609,99.822 ; v1(167.513,105.918) v1@173.609,99.822 ; v1(173.863,99.822) v1@173.609,99.822
5V: A1.2 A2.2 C1.1 C12.1 C13.1 C17.2 C18.2 C19.2 C20.2 C21.2 C22.2 C24.1 C30.1 CAN1.1 L2.1 R8.1 R11.2 R19.2 R30.2 U1.1 U1.3 U6.2 U7.5 U9.3 U10.1 U10.3 | length 156.9
  Top Layer w0.3: C12.1 C12.1@143.624,94.398 ; U6.2 145.842,94.248 143.774,94.248 C12.1@143.624,94.398 ; U7.5 147.657,63.993 146.886,63.223 146.886,59.476 147.561,58.801 v1(151.892,58.801) ; v1(147.828,87.122) v1(143.637,87.122) 143.624,87.135 C13.1 C12.1@143.624,94.398 ; v1(152.4,88.265) 152.508,88.265 152.635,88.138 155.575,88.138 156.967,86.746 160.777,86.746 v1(161.544,85.979) ; v1(155.321,59.182) 155.321,59.346 156.681,60.706 160.057,60.706 160.644,60.119 161.381,60.119 R19.2 161.744,59.756 162.444,59.756 164.415,57.785 167.861,57.785 168.374,58.299 168.594,58.299 169.134,58.839 C19.2 ; C24.1 v1(156.486,81.468) 157.774,81.468 157.873,81.567 158.141,81.567 158.291,81.717 U9.3 ; C1.1 167.431,86.62 U1.1@169.348,86.62 ; v1(169.136,58.9) C19.2@169.136,59.057 ; U1.1@169.774,86.665 171.12,88.011 172.972,88.011 174.117,89.156 R8.1 ; C30.1 171.845,71.399 173.596,71.399 R30.2
  Top Layer w1: R11.2 167.17,76.374 170.423,73.121 ; C19.2 169.136,59.057 170.878,59.057 ; C20.2 169.137,61.592 170.878,61.592 ; U10.1@169.223,71.284 170.423,71.284 ; U1.3@169.393,84.746 170.423,83.715 170.423,73.121 ; L2.1 L2.1@170.053,65.722 ; C30.1 171.702,71.284 170.423,71.284 ; C22.2 172.619,59.057 170.878,59.057 ; C18.2 172.618,61.592 170.878,61.592 ; C17.2 172.621,64.99 172.431,65.18 170.596,65.18 L2.1@170.053,65.722 ; C21.2 172.621,67.628 172.431,67.818 170.423,67.818 170.423,71.284 ; L2.1@170.053,65.722 170.053,62.417 170.878,61.592 ; 170.423,71.284 170.423,73.121 ; 170.878,59.057 170.878,61.592
  Bottom Layer w0.3: A2.2 144.66,79.248 147.004,81.592 147.004,83.348 146.855,83.497 146.855,86.149 v1(147.828,87.122) 148.971,88.265 v1(152.4,88.265) ; v1(151.892,58.801) 154.94,58.801 v1(155.321,59.182) ; v1(156.486,81.468) 160.208,81.468 162.941,84.201 ; v1(161.544,85.979) 162.941,84.582 162.941,84.201 ; v1(169.418,86.741) 169.418,84.811 v1(169.393,84.785) 168.808,84.201 162.941,84.201
  Bottom Layer w1: CAN1.1 162.56,52.324 v1(169.136,58.9)
ADC_5V: DD1.8 R30.1 R31.2 | length 35.4
  Top Layer w0.3: v1(146.685,77.216) 146.685,77.324 147.044,77.683 147.044,78.158 147.249,78.363 147.914,78.363 DD1.8 ; v1(149.225,73.406) 150.712,73.406 151.17,73.864 158.646,73.864 160.728,75.946 v1(163.703,75.946) ; v1(173.609,72.886) R31.2
  Bottom Layer w0.3: v1(146.685,77.216) 146.685,75.946 v1(149.225,73.406) ; v1(163.703,75.946) 170.549,75.946 v1(173.609,72.886)
ADC_CUR: DD1.10 R16.2 U7.1 | length 17.5
  Top Layer w0.3: U7.1 147.786,62.167 147.786,63.069 148.305,63.588 148.305,64.345 148.525,64.565 148.525,75.601 148.749,75.825 DD1.10
  Top Layer w0.4: R16.2 147.621,60.106 147.621,62.002 U7.1
ADC_VIN: DD1.7
AVG_OPTIC: R3.1 R9.2 TP1.1 U3.4 | length 21.6
  Top Layer w0.2: v1(162.687,104.14) 162.687,105.42 162.804,105.537 164.211,105.537 164.465,105.283 164.465,104.904 U3.4
  Bottom Layer w0.2: v1(162.687,104.14) 165.115,106.568 168.133,106.568 173.99,100.711 173.99,100.614 174.513,100.091 174.513,99.553 173.99,99.03 v1(173.99,97.917)
BOOT0: DD1.35 R27.2 | length 2
  Top Layer w0.2: R27.2 149.249,84.443 DD1.35
CAN_H: CAN1.2 CAN2.3 R26.2 U9.7 | length 37.2
  Top Layer w0.2: CAN2.3 157.94,54.649 159.258,53.331 v1(159.258,52.451) ; U9.7 162.162,82.367 R26.2@162.643,82.848
  Bottom Layer w0.2: v1(159.258,52.451) 159.258,54.453 160.035,55.23 160.035,58.054 162.252,60.271 162.252,79.517 162.687,79.952 v1(162.687,82.931)
CAN_L: CAN1.3 CAN2.4 R26.1 U9.6 | length 32.8
  Top Layer w0.2: v1(159.385,55.499) CAN2.4 ; U9.6 161.176,81.669 162.564,81.669 R26.1@162.814,81.419
  Bottom Layer w0.2: CAN1.3 158.008,54.122 v1(159.385,55.499) 159.385,58.058 161.852,60.525 161.852,81.588 v1(161.925,81.661)
CAN_RXD: DD1.23 U9.4 | length 5.3
  Top Layer w0.2: DD1.23 157.226,79.883 158.404,81.061 U9.4
CAN_TXD: DD1.24 U9.1 | length 5.9
  Top Layer w0.2: DD1.24 154.551,80.383 155.321,81.153 155.321,81.627 155.951,82.257 156.899,82.257 157.137,82.495 157.137,82.565 157.589,83.017 158.023,83.017
CHG: C8.1 C9.1 C10.1 C11.1 M1.2 M1.4 Q1.S Q2.D R11.1 TP7.1 | length 54.2
  Top Layer w1: TP7.1 142.672,105.461 M1.4 M1.2 150.417,100.457 151.003,99.871 151.003,97.984 152.273,97.984 153.543,97.984 154.813,97.984 155.635,97.984 156.718,96.901 ; 158.307,100.765 157.917,100.765 157.267,100.765 157.267,97.45 156.718,96.901 ; R11.1 166.068,79.074 166.018,79.124 166.018,83.156 161.578,87.596 158.072,87.596 156.718,88.95 156.718,96.901
EN: U2.1
FB: R19.1 R21.2 U8.5 | length 4.1
  Top Layer w0.4: R21.2 R19.1 161.544,63.019 161.644,63.119 U8.5
GND: A1.1 A2.1 C1.2 C2.2 C3.2 C4.2 C5.1 C6.2 C7.2 C8.2 C9.2 C10.2 C11.2 C12.2 C13.2 C15.2 C16.2 C17.1 C18.1 C19.1 C20.1 C21.1 C22.1 C23.1 C24.2 C25.2 C26.2 C27.2 C28.2 C29.2 C30.2 C31.2 CAN1.4 CAN1.SH1 CAN1.SH2 CAN2.5 CAN2.6 CAN2.P1 CAN2.P2 D3.A D4.C DD1.5 DD1.17 DD1.18 DD1.26 DD1.36 DD1.37 L1.1 R2.1 R7.2 R9.1 R13.2 R16.1 R20.1 R21.1 R23.1 R27.1 R31.1 SWD1.1 TP10.1 TP11.1 TP12.1 U1.2 U2.7 U3.5 U3.8 U3.9 U4.2 U5.2 U5.4 U6.6 U6.7 U7.2 U8.7 U8.9 U9.2 U9.8 U9.P$9 U10.2 Y1.2 | length 358.4
  Top Layer w0.2: TP10.1 142.38,96.025 C12.2 C13.2 142.38,85.778 v1(143.295,84.863) 142.845,84.413 142.845,82.485 Y1.2@143.345,81.985 ; v1(143.168,76.708) 142.367,77.509 142.367,81.007 Y1.2@143.345,81.985 ; Y1.2 Y1.2@143.345,81.985 ; v1(145.923,78.74) 147.036,79.853 147.904,79.853 DD1.5 DD1.37 ; 147.817,82.931 147.701,82.815 147.818,82.698 DD1.36 148.774,82.673 148.774,81.858 DD1.37 ; R13.2 148.848,89.15 R27.1@148.848,86.344 ; v1(149.136,86.106) 149.148,86.094 149.198,86.094 150.197,87.093 150.197,87.166 151.946,88.915 152.415,88.915 v1(152.781,89.281) ; U6.6 152.596,93.528 C5.1@152.781,93.713 ; U6.7 152.467,94.178 C5.1@152.781,93.864 ; C15.2 C16.2 154.526,69.651 155.212,69.651 156.266,70.705 156.316,70.705 157.296,71.685 155.817,73.164 R23.1 ; DD1.18 152.749,75.914 ; v1(152.781,94.869) C5.1@152.781,93.864 ; C3.2 C5.1 152.794,93.851 C5.1@152.781,93.864 ; v1(154.686,82.677) 154.404,82.395 154.404,81.629 154.188,81.413 153.594,81.413 DD1.26 152.249,81.383 DD1.37 ; D4.C 156.649,77.043 156.649,76.965 C27.2@157.949,75.665 ; D3.A@156.661,71.558 v1(156.718,71.501) ; v1@158.093,82.169 158.291,82.367 U9.2 ; C8.2 v1(158.102,91.694) C9.2 C10.2 ; v1(159.004,75.692) 158.877,75.565 C27.2 ; U9.8 160.491,83.017 159.766,82.292 U9.P$9 159.766,77.482 C27.2@157.949,75.665 ; R9.1 U3.9@164.674,102.896 ; U3.5 164.506,102.728 U3.9@164.674,102.896 ; C31.2 164.819,73.113 165.669,72.263 v1(167.767,72.263) ; U2.7 167.376,93.771 168.143,94.538 168.143,95.161 U5.4@168.294,95.311 ; C20.1 166.396,61.81 167.767,63.181 v1(167.767,72.263) ; U3.8 166.456,102.728 165.806,103.378 v1(165.481,103.378) 165.156,103.378 U3.9@164.674,102.896 ; U4.2 167.259,96.346 U5.4@168.294,95.311 ; U4.2@167.396,97.666 167.396,98.435 167.64,98.679 168.91,98.679 169.474,99.243 169.599,99.243 169.799,99.443 R7.2 v1@169.799,101.854 ; U10.2 v1(167.767,72.263) ; C6.2 169.799,105.905 v1@169.799,101.854 ; TP12.1 v1@169.799,101.854 ; TP11.1 172.593,73.963 v1(171.743,73.113) C30.2 171.931,73.113 172.819,72.225 174.448,72.225 175.287,71.386 R31.1 175.359,71.358 C21.1 ; C2.2 173.69,85.175 172.704,85.175 172.154,85.725 U1.2 168.336,85.725 167.486,84.875 C1.2 167.286,84.875 166.986,85.175 166.986,85.275 166.116,86.145 166.116,87.249 168.148,89.281 R2.1 169.745,89.481 169.745,90.497 170.053,90.805 170.053,92.837 170.043,92.847 170.043,93.407 169.849,93.601 170.28,94.032 170.28,94.048 U5.2@170.594,94.361 ; C7.2 174.104,93.851 173.504,94.451 171.039,94.451 U5.2 U5.2@170.594,94.361 ; DD1.37 152.249,78.383 DD1.17 152.279,77.038 152.279,75.94 152.444,75.775 152.61,75.775 152.749,75.914 ; 152.749,75.914 153.734,75.914 155.099,74.549 156.933,74.549 157.549,75.165 157.649,75.165 157.949,75.465 C27.2 ; C27.2 C27.2@157.949,75.665 ; U5.4@168.294,95.311 U5.4 169.004,95.311 169.926,94.389 170.015,94.389 170.043,94.361 U5.2@170.594,94.361
  Top Layer w0.4: U7.2 148.597,60.66 v1(149.086,60.171) R16.1 ; v1(154.908,49.124) 153.39,49.124 152.69,49.824 CAN2.P1 CAN2.P2 ; v1(157.226,59.944) 157.238,59.956 R21.1 159.612,59.956 162.433,57.135 v1(162.433,55.499) ; CAN2.5 v1(162.433,55.499) ; v1(162.358,49.124) 163.99,49.124 164.69,49.824 CAN2.P2 ; C23.1 v1(163.949,59.936) 164.826,59.059 C19.1 C20.1 ; C22.1 C18.1 C17.1 C21.1 ; v1(162.433,55.499) 162.433,54.056 164.69,51.799 CAN2.P2
  Top Layer w1: U8.9@159.5,65.024 159.5,65.059 160.065,65.624 160.935,65.624 160.97,65.659 U8.7
  Bottom Layer w0.2: A2.1 A2.1@144.375,76.708 ; v1(145.923,78.74) 145.954,78.709 145.954,78.002 144.66,76.708 A2.1@144.375,76.708 ; SWD1.1 146.177,73.107 144.86,74.424 144.86,76.223 A2.1@144.375,76.708 ; 147.817,82.931 147.817,83.077 147.454,83.44 147.454,83.783 147.305,83.932 147.305,84.47 148.941,86.106 v1(149.136,86.106) ; L1.1 150.876,106.726 147.574,103.424 147.574,97.018 147.691,96.901 150.749,96.901 v1(152.781,94.869) ; v1(152.781,89.281) 153.67,88.392 154.8,88.392 v1(158.102,91.694) ; v1(154.686,82.677) 154.755,82.746 154.755,84.046 156.053,85.344 v1(157.988,85.344) ; v1(156.718,71.501) v1@156.814,71.597 ; v1(157.226,59.944) 160.25,62.968 U8.9@160.25,63.524 ; v1(157.787,82.296) 157.099,82.296 v1(156.337,83.058) 156.352,83.073 156.352,83.708 v1(157.988,85.344) ; U8.9@158.75,66.524 158.75,70.231 157.353,71.628 157.322,71.597 v1@156.814,71.597 ; v1(159.004,75.692) 159.004,73.787 v1@156.814,71.597 ; v1(162.902,79.248) 162.902,74.842 165.481,72.263 v1(167.767,72.263) 170.893,72.263 v1(171.743,73.113) ; v1(165.481,103.378) 165.481,101.854 163.278,99.651 163.278,98.566 164.308,97.536 v1(167.259,97.536) 167.259,92.934 159.669,85.344 v1(157.988,85.344)
  Bottom Layer w0.4: v1(149.086,60.171) 156.999,60.171 v1(157.226,59.944) ; v1(154.908,49.124) 156.658,50.874 156.658,52.224 CAN1.4 ; v1(162.433,55.499) 163.949,57.015 v1(163.949,59.936)
  other v1: 146,50 148,50 150,50 158,50 160,50 168,50 170,50 172,50 145,52 147,52 149,52 151,52 155,52 167,52 169,52 171,52 173,52 175,52 144,54 146,54 148,54 150,54 152,54 166,54 168,54 170,54 172,54 174,54 145,56 147,56 149,56 151,56 153,56 169,56 171,56 173,56 175,56 144,58 146,58 148,58 150,58 156,58 158,58 162,58 174,58 145,60 165,60 144,62 146,62 154,62 156,62 174,62 145,64 165,64 167,64 144,66 146,66 150,66 168,66 174,66 167,68 144,70 150,70 160,70 164,70 166,70 168,70 172,70 174,70 153,72 159,72 144,74 146,74 160,74 168,74 174,74 175,76 172,78 174,78 159,80 169,80 173,80 175,80 168,82 172,82 174,82 160,86 166,86 147,88 163,88 165,88 167,88 169,88 164,90 172,90 151,92 164,94 145,96 151,96 153,96 155,96 161,96 163,96 167,96 144,98 146,98 148,98 153,100 155,100 161,100 163,100 144,102 146,102 148,102 170,102 174,102 145,104 147,104 161,104 173,104 175,104 146,106 148,106 160,106 162,106 174,106 147,108 149,108 151,108 157,108 161,108 163,108 167,108 173,108 175,108 144,110 146,110 148,110 156,110 158,110 160,110 162,110 147,112 149,112 151,112 153,112 155,112 157,112 159,112 161,112
INT: U2.8
LASER_ENABLE: R12.1
LED: DD1.20 R29.1 | length 3.3
  Top Layer w0.3: DD1.20 154.886,78.383 155.324,78.821 156.276,78.821 156.476,79.021 R29.1
MISO/ADC_VC: DD1.13 U2.9 | length 29.3
  Top Layer w0.2: DD1.13 150.249,76.106 150.48,75.875 150.48,74.437 v1(150.495,74.422) ; v1(159.385,92.818) 159.481,92.914 159.481,93.101 159.502,93.122 159.775,93.122 159.776,93.121 U2.9
  Bottom Layer w0.2: v1(150.495,74.422) 150.48,74.437 150.48,79.474 152.127,81.121 152.127,85.941 153.27,87.084 156.583,87.084 160.147,90.648 160.147,92.456 159.881,92.722 159.481,92.722 v1(159.385,92.818)
MOSI/ADC_MID: DD1.14 U2.10 | length 27
  Top Layer w0.2: DD1.14 150.76,77.057 150.76,76.228 151.034,75.953 151.034,75.661 v1(151.13,75.565) ; U2.10 161.776,92.471 161.792,92.487 162.316,92.487 162.316,92.446 v1(162.433,92.329)
  Bottom Layer w0.2: v1(151.13,75.565) 152.527,76.962 152.527,85.776 153.435,86.684 156.758,86.684 160.547,90.473 160.547,90.697 161.315,91.465 161.569,91.465 v1(162.433,92.329)
NetC5_2: C5.2 U2.13 | length 14.3
  Top Layer w0.2: C5.2 v1(154.051,93.726) ; U2.13 162.403,90.521 v1(162.433,90.551)
  Bottom Layer w0.2: v1(154.051,93.726) 158.056,93.726 158.198,93.868 162.067,93.868 162.448,93.487 162.76,93.487 163.483,92.764 163.483,91.601 v1(162.433,90.551)
NetC6_1: C6.1 D1.1 LED1.1 LED2.1 LED3.1 TP3.1 U3.3 | length 23.5
  Top Layer w0.2: D1.1 163.449,108.68 165.156,106.973 U3.3 ; C6.1 171.183,107.695 LED3.1 171.361,107.917 LED2.1@171.361,109.881 ; LED1.1@171.383,111.831 LED2.1 LED2.1@171.361,109.881 ; TP3.1 171.641,109.601 LED2.1@171.361,109.881
  Bottom Layer w0.2: D1.1 163.751,111.3 164.609,111.3 165.578,112.268 v1(171.704,112.268)
NetC14_1: C14.1 D3.C L2.2 U8.8 | length 14.2
  Top Layer w1: C14.1 163.005,68.58 ; U8.8 164.521,66.929 L2.2@164.973,66.477 ; D3.C@162.216,71.755 162.216,69.368 163.005,68.58 ; L2.2 L2.2@164.973,66.477 ; 163.005,68.58 164.973,66.611 L2.2@164.973,66.477
NetC14_2: C14.2 U8.1 | length 1.4
  Top Layer w1: U8.1@157.011,67.183 C14.2
NetC23_2: C23.2 U8.6 | length 4.5
  Top Layer w0.4: U8.6 162.075,64.289 163.549,64.289 163.83,64.008 C23.2
NetD1_2: D1.2 LED1.2 LED2.2 LED3.2 TP2.1 U3.2 | length 21.4
  Top Layer w0.2: U3.2 165.866,104.923 U3.2@165.866,105.214 ; TP2.1 169.042,109.352 169.358,109.352 169.733,109.727 LED2.2 167.085,109.902 D1.2 ; LED1.2 167.311,112.32 D1.2 ; LED3.2 169.917,107.592 169.717,107.392 168.044,107.392 U3.2@165.866,105.214 ; U3.2@165.866,105.214 165.866,110.875 D1.2
NetD2_A: D2.A U2.2 | length 3.6
  Top Layer w0.2: U2.2 169.049,90.521 D2.A@169.049,91.44
NetD2_C: D2.C R2.2 | length 2.3
  Top Layer w0.2: D2.C@170.549,91.44 170.789,91.2 R2.2
NetD4_A: D4.A R29.2 | length 1.8
  Top Layer w0.3: D4.A 157.913,77.406 157.913,79.058 R29.2
NetL1_2: L1.2 M1.3 Q1.D Q2.S TP9.1 | length 27.1
  Top Layer w1: M1.3 149.352,105.029 150.749,106.426 154.051,106.426 ; Q2.S@152.273,103.184 152.46,102.997 153.465,102.997 154.305,103.837 154.305,106.426 ; L1.2 154.051,106.426 ; Q1.D 158.242,104.835 157.446,105.63 ; TP9.1 157.446,106.011 157.446,105.63 ; 154.051,106.426 154.305,106.426 ; 154.305,106.426 156.651,106.426 157.446,105.63
NetM1_1: M1.1 Q1.G Q2.G R15.2 U6.1 U6.8 | length 30.1
  Top Layer w0.2: U6.1 146.291,94.828 146.42,94.957 146.42,95.493 v1(146.939,96.012) 148.613,96.012 ; R15.2 v1(146.939,91.16) ; v1(149.352,98.157) 149.301,98.157 148.995,97.851 148.995,97.8 148.613,97.418 148.613,96.012 ; U6.8 149.797,94.828 148.613,96.012 ; Q1.G 159.258,100.724 v1(159.258,99.949)
  Bottom Layer w0.2: v1(146.939,91.16) v1(146.939,96.012) ; v1(151.003,103.124) 149.352,101.473 v1(149.352,98.157) 157.466,98.157 v1(159.258,99.949)
NetR1_2: R1.2 R3.2 R4.1 | length 4.2
  Top Layer w0.2: R4.1 171.069,98.042 172.393,99.366 172.393,99.495 R1.2 172.593,98.044 R3.2
NetR4_2: R4.2 R7.1 U4.3 | length 4
  Top Layer w0.2: U4.3 168.209,97.567 168.359,97.717 169.625,97.717 R4.2 169.825,98.042 170.843,99.061 170.843,99.368 R7.1
NetR5_2: R5.2 U3.6 | length 2.5
  Top Layer w0.2: R5.2 164.59,99.796 164.79,99.996 164.79,100.121 165.156,100.487 U3.6
NetR10_2: R10.2 U5.3 | length 2
  Top Layer w0.2: U5.3 172.654,95.311 R10.2
NetR12_2: R12.2 R13.1 U6.5 | length 3.8
  Top Layer w0.2: R13.1 R12.2 150.252,91.35 U6.5
NetR20_2: R20.2 U8.4 | length 1.8
  Top Layer w0.4: U8.4 157.126,63.119 157.226,63.019 R20.2
NetTP5_1: TP5.1 U2.4 U4.1 | length 9.3
  Top Layer w0.2: U4.1 166.309,97.174 164.973,95.838 164.973,92.202 165.354,91.821 U2.4 166.488,91.821 ccw(c166.488,93.989) TP5.1
NetTP6_1: TP6.1 U3.7 U4.4 | length 5.3
  Top Layer w0.2: U3.7 165.806,101.673 165.996,101.483 165.996,101.412 166.443,100.965 166.936,100.965 167.566,100.335 168.059,100.335 168.209,100.184 168.209,100.007 168.242,100.04 168.242,101.821 TP6.1
NetU2_5: U2.5 U5.5 | length 2.7
  Top Layer w0.2: U2.5 166.398,92.493 167.042,92.493 167.96,93.411 U5.5
NSS/ADC_VA: DD1.11 U2.11 | length 25.2
  Top Layer w0.2: DD1.11 149.249,75.541 v1(149.352,75.438) ; v1(159.258,91.821) U2.11
  Bottom Layer w0.2: v1(149.352,75.438) 149.352,81.407 150.891,82.946 150.891,86.021 152.485,87.615 152.669,87.615 152.938,87.884 155.321,87.884 v1(159.258,91.821)
OSC_IN: DD1.2 Y1.1 | length 4
  Top Layer w0.2: Y1.1@144.873,83.185 144.945,83.185 145.045,83.085 145.045,82.739 146.401,81.383 DD1.2
OSC_OUT: DD1.3 Y1.3 | length 3.8
  Top Layer w0.2: Y1.3 144.213,80.853 147.904,80.853 DD1.3
PULSE_LASER: R14.1 R15.1 TP8.1 U6.4 | length 5.3
  Top Layer w0.2: TP8.1 144.631,90.402 145.01,90.402 R15.1@145.568,90.96 ; R14.1 R15.1@145.568,90.96 ; U6.4 145.869,92.835 145.869,91.386 R15.1 145.669,91.061 R15.1@145.568,90.96
PWM2A: DD1.29
PWM2B: DD1.30
PWM2C: DD1.9
PWM3A: DD1.31
PWM3B: DD1.32
PWM3C: DD1.15
RX: DD1.22
SCK/ADC_VB: DD1.12 U2.12 | length 26.7
  Top Layer w0.2: v1(149.479,74.422) 150.002,74.945 150.002,75.787 149.749,76.04 DD1.12 ; v1(159.385,90.805) 159.41,90.805 159.776,91.171 U2.12
  Bottom Layer w0.2: v1(149.479,74.422) 150.002,74.945 150.002,79.771 151.727,81.496 151.727,86.107 153.104,87.484 156.064,87.484 v1(159.385,90.805)
SCL/PWM4A: A1.3 DD1.33 R24.1 | length 18.5
  Top Layer w0.2: v1(145.901,84.191) 145.911,84.201 147.036,84.201 148.279,85.444 151.958,85.444 152.808,84.594 152.047,83.833 150.79,83.833 150.279,83.322 150.279,82.728 DD1.33
  Bottom Layer w0.2: A1.3 144.66,89.535 145.16,89.035 145.16,88.119 145.901,87.378 v1(145.901,84.191)
SDA/PWM4B: A2.3 DD1.34 R25.1 | length 11.5
  Top Layer w0.2: v1@145.985,82.931 v1@146.112,83.058 ; v1@146.239,83.185 146.667,83.614 147.368,83.614 v1(147.955,84.201) ; DD1.34 149.779,82.728 149.779,83.47 150.903,84.594 R25.1 150.761,84.836 150.761,84.817 150.653,84.709 v1(150.241,84.709)
  Bottom Layer w0.2: A2.3 144.66,81.788 145.834,82.962 146.208,82.962 v1(146.304,83.058) ; v1(147.955,84.201) 148.463,84.709 v1(150.241,84.709)
START: R14.2 TP4.1 U2.3 | length 25.2
  Top Layer w0.2: v1(164.719,91.313) 164.832,91.2 166.347,91.2 U2.3 167.678,91.171 ccw(c167.678,91.656) TP4.1
  Bottom Layer w0.2: v1(146.812,89.027) 152.004,94.219 153.371,94.219 153.528,94.376 154.895,94.376 155.003,94.268 162.545,94.268 164.719,92.094 v1(164.719,91.313)
STM_NRST: DD1.4 R28.2 | length 3.8
  Top Layer w0.2: R28.2 144.895,78.713 146.565,80.383 DD1.4
SWDIO: DD1.25 SWD1.3 | length 22.7
  Top Layer w0.2: DD1.25 153.594,80.913 154.254,80.913 154.804,81.463 154.804,81.676 155.336,82.208 155.336,83.678 155.448,83.79 v1(155.448,83.82)
  Bottom Layer w0.3: SWD1.3 146.677,69.957 147.427,70.707 148.477,70.707 155.386,77.616 155.386,83.758 v1(155.448,83.82)
SWLK: DD1.28 SWD1.2 | length 20.8
  Top Layer w0.3: DD1.28 152.749,83.068 154.305,84.624 v1(154.305,84.709)
  Bottom Layer w0.3: SWD1.2 148.27,71.207 153.986,76.923 153.986,82.967 154.305,83.286 v1(154.305,84.709)
TX: DD1.21
VCC: C7.1 R6.2 R8.2 R10.1 U5.1 | length 11.3
  Top Layer w0.2: U5.1 172.66,93.411 C7.1@172.86,93.611 ; C7.1 C7.1@172.86,93.611 ; R8.2 R6.2 172.86,91.58 172.86,92.595 ; R10.1 174.291,95.304 174.291,94.688 174.923,94.056 174.923,93.396 174.123,92.595 172.86,92.595 ; 172.86,92.595 C7.1@172.86,93.611
VERSION: DD1.16 R22.1 R23.2 | length 4.2
  Top Layer w0.3: DD1.16 151.749,75.936 151.83,75.855 151.83,74.729 R22.1 R23.2
Vin: C15.1 C16.1 R17.2 R18.2 U7.4 U8.2 | length 13.1
  Top Layer w1: U7.4 149.697,64.535 151.67,64.535 151.701,64.566 ; R18.2 152.779,63.436 ccw(c152.779,61.912) 151.701,62.99 151.701,64.566 ; C16.1 C15.1 151.701,66.142 151.701,64.566 ; C16.1@154.305,65.659 U8.2
Vin+: CAN2.1 CAN2.2 R17.1 R18.1 U7.3 | length 12.3
  Top Layer w0.3: U7.3 149.536,61.657 150.167,61.026 R17.1
  Top Layer w1: R17.1 151.915,60.876 153.356,60.876 153.716,60.516 R18.1 154.051,57.238 154.94,56.349 CAN2.1 CAN2.2
pads on no net: U1.4 U2.6 U6.3 U6.9 U8.3 U10.4